# Altium PCB SS12D00G3_2020-09-11_13-28-16.pcbdoc
Units mm, origin at the board's own origin, x right, y up, seen from the top; angles counter-clockwise.
Board outline 35.24 x 29.85 mm, 2 copper layers (Top Layer, Bottom Layer); 1 components, 0 nets, 3 pads, 0 vias.
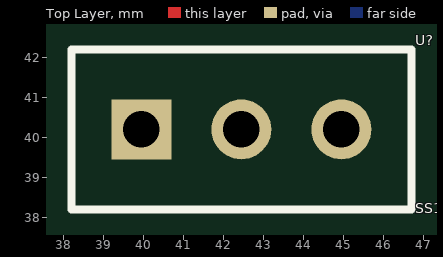
[diagram p0: Top Layer view]
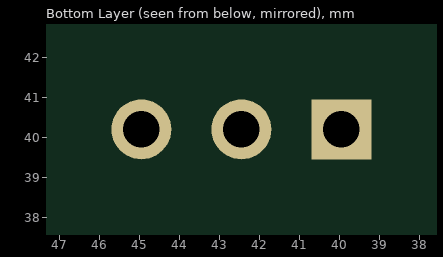
[diagram p1: Bottom Layer view, seen from below]

## Layer stack, top to bottom
Top Layer: signal copper (thickness not stored)
Dielectric: dielectric 0.32, FR-4, Dk 4.8
Bottom Layer: signal copper (thickness not stored)

## Board outline
60.644,25.4 25.4,25.4 25.4,55.255 60.644,55.255

## Components (designator, comment, footprint, x,y, rotation, side; value= is the part's Value field where it differs from the comment)
U? "SS12D00G3" SS12D00G3 42.45,40.2 r0 top

## Footprints (in the part's own frame and the unit in brackets; to place one, negate y for a bottom-side part, rotate by r counter-clockwise, add the part's x,y. Pads: shape width x height; smd on the part's side, far side on the other; paste and mask are expansions set on the pad)
SS12D00G3 [mil]
  rect 59x59 hole 36: 1(-98.42,-0.01)
  round 59 hole 36: 2(-0.04,0.04) 3(98.46,0.04)
  silkscreen extent -167,-79 167,79

## Nets (pads, with @x,y where several pads share a name; then routed paths per layer and width w, separated by ;. In a path a pad name is that pad's centre, name@x,y a point inside that pad or via, vN(x,y) a via of type N, cw(c..) or ccw(c..) an arc to the next point about the centre after c; other vN are vias at no path point)
pads on no net: U?.1 U?.2 U?.3

## Silkscreen, mask and mechanical layers (free items; w line width, h text height)
Document:
  lines w0.003: 42.996,40.302 43.047,40.353